# Altium PCB PCB_HB.PcbDoc
Units mil, origin at the board's own origin, x right, y up, seen from the top; angles counter-clockwise.
Board outline 3478 x 2869 mil, 2 copper layers (Top Layer, Bottom Layer); 44 components, 24 nets, 126 pads, 0 vias.
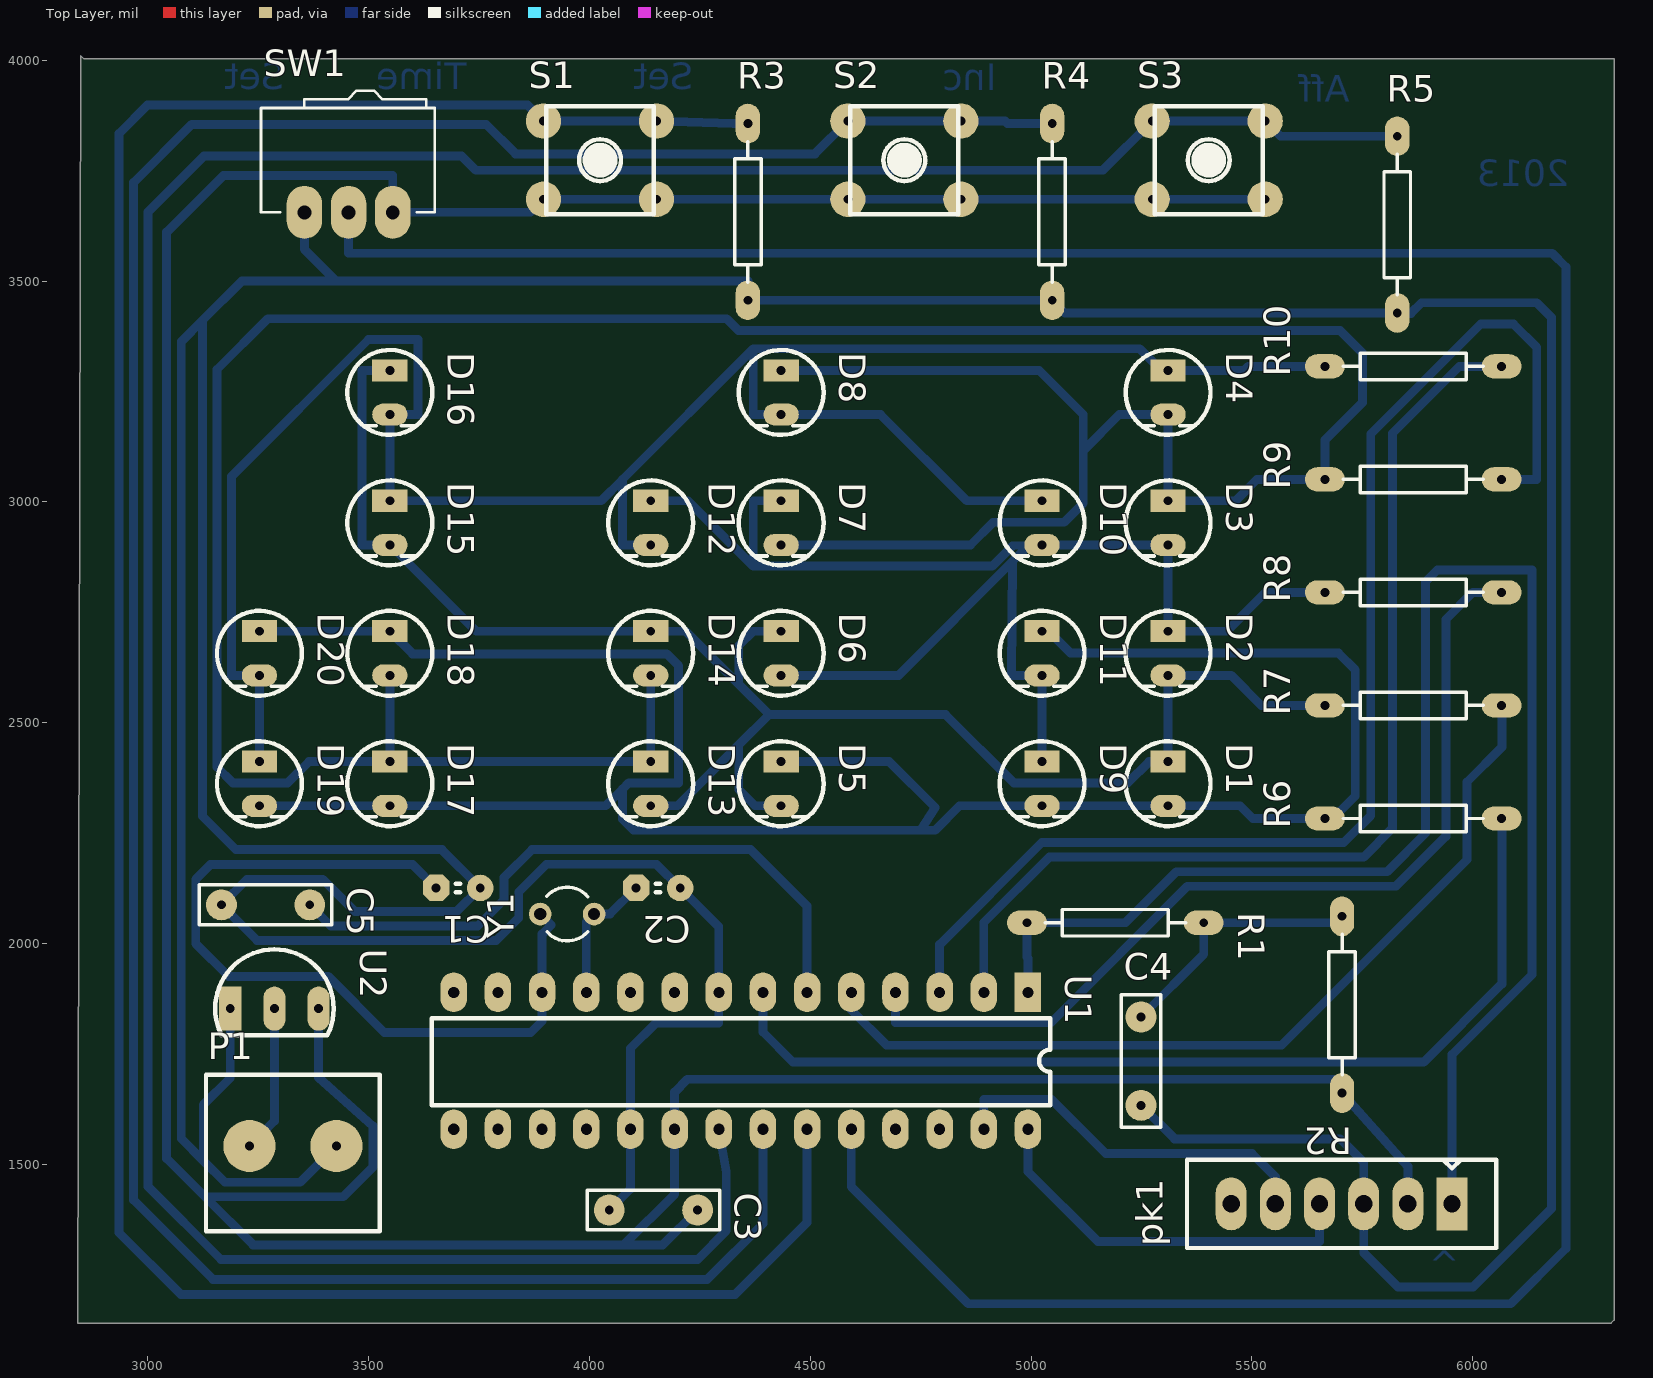
[diagram p0: Top Layer view]
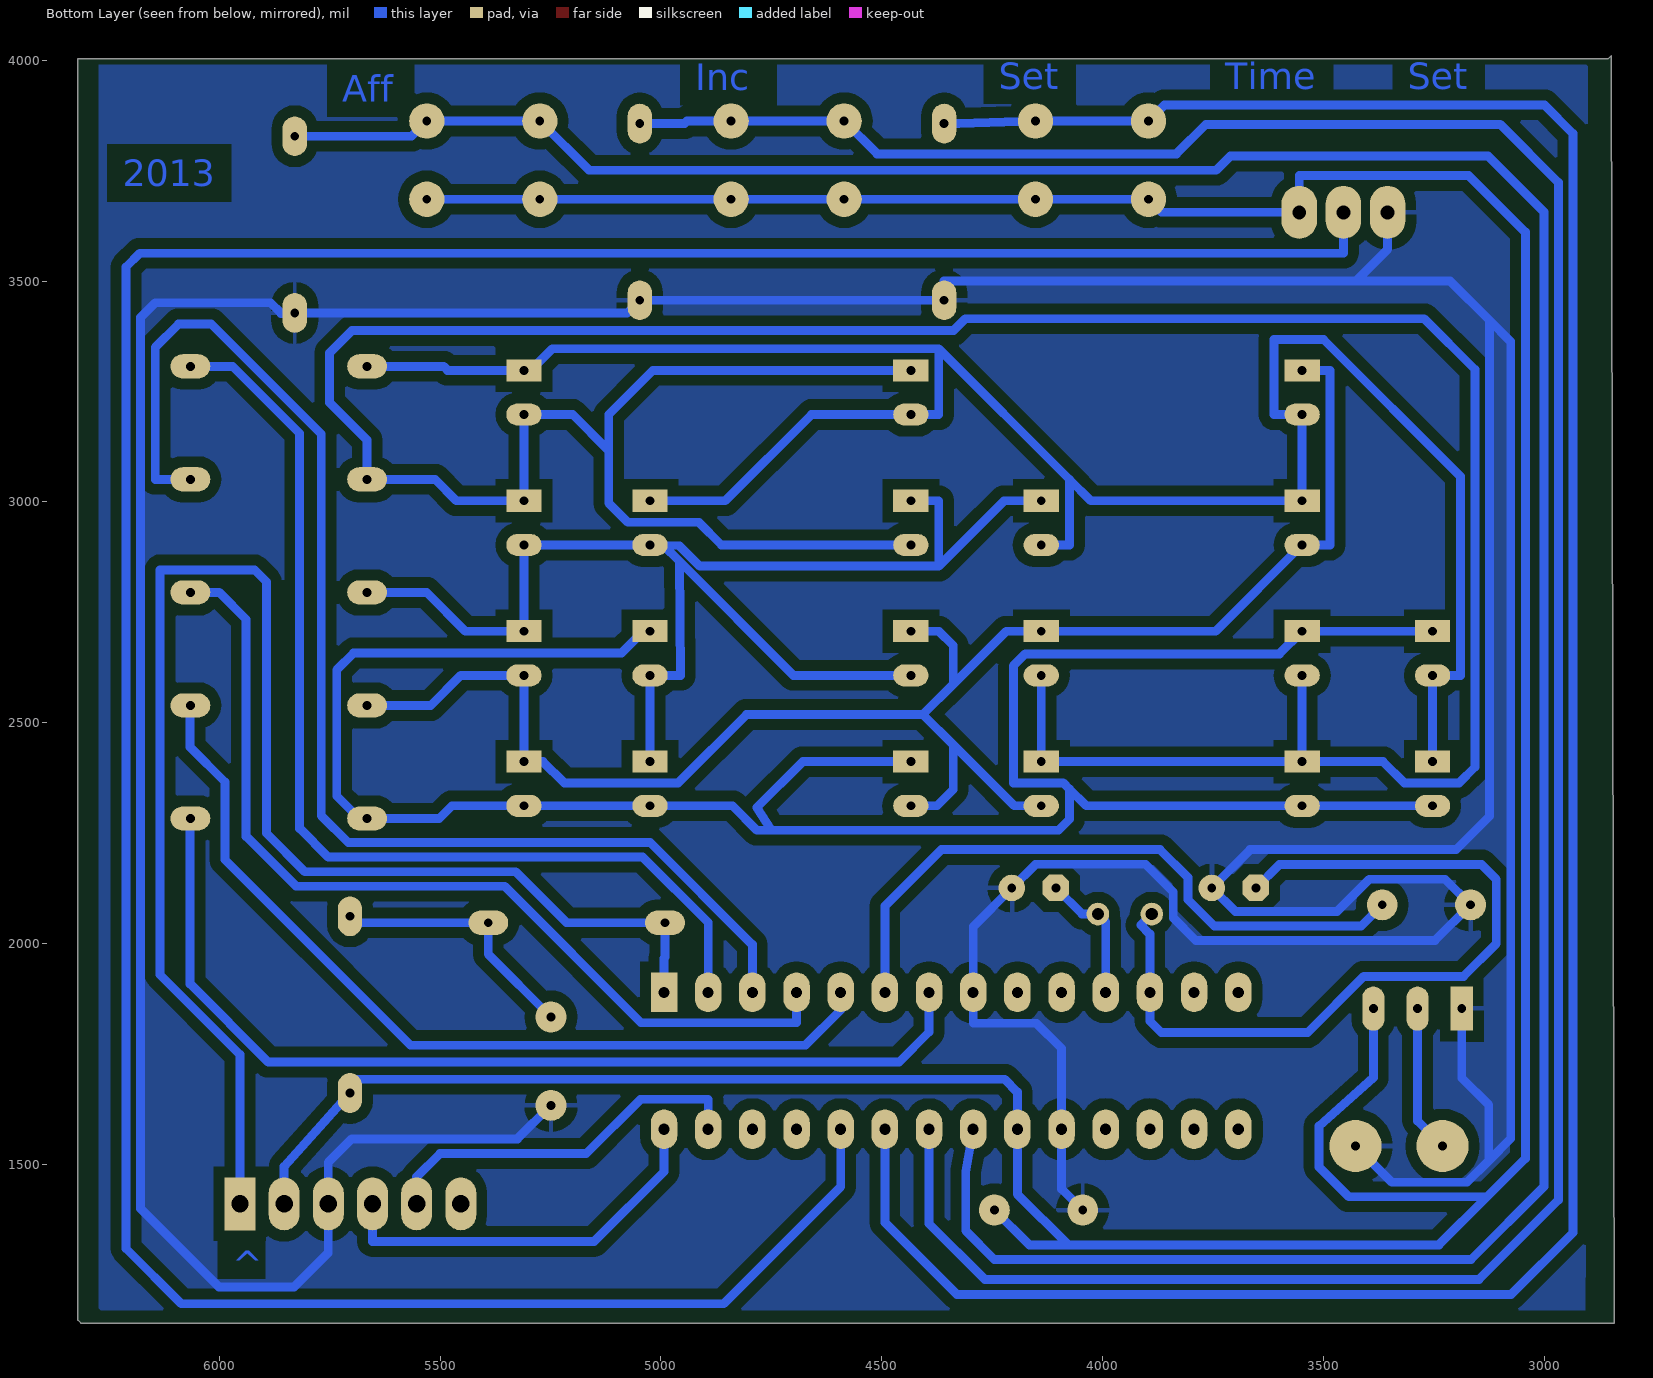
[diagram p1: Bottom Layer view, seen from below]

## Layer stack, top to bottom
Top Layer: signal copper 1.4
Dielectric: dielectric 12.6, FR-4, Dk 4.8
Bottom Layer: signal copper 1.4

## Board outline
2849,4010 2856,4003 6320,4003 6320,1148 6313,1141 2842,1141

## Design rules (kind name [scope] priority, off if disabled: settings)
Clearance [All] p1: gap=13
PolygonConnect [All] p1: connectstyle=Relief reliefconductorwidth=10 reliefentries=4 polygonreliefangle="90 Angle"
RoutingLayers [All] p1: top layer_v5=FALSE bottom layer_v5=TRUE
RoutingVias [All] p1: holewidth=28 width=50 viastyle="Through Hole" minholewidth=28 minwidth=50 maxholewidth=28 maxwidth=50
SilkToSilkClearance [All] p1 off: silktosilkclearance=10
SilkscreenOverComponentPads [All] p1 off: minsilkscreentomaskgap=10
SolderMaskExpansion [All] p1: expansion=4
Width [All] p1: maxlimit=20 minlimit=15 preferedwidth=20
25 further rules are at their usual default settings.

## Classes and differential pairs
net class leds: A B C D E

## Components (designator, comment, footprint, x,y, rotation, side; value= is the part's Value field where it differs from the comment)
C1 "12pF" Capa_ceramique1 3752.84,2126.19 r180 top
C2 "12pF" Capa_ceramique1 4205.6,2126.19 r180 top
C3 "100nF" Capa_plastique 4045,1397 r0 top
C4 "100nF" Capa_plastique 5248.91,1634.06 r90 top
C5 "10uF" Capa_plastique 3167,2088 r0 top
D1 "LED" Led_5mm 5305.12,2362.2 r270 top
D2 "LED" Led_5mm 5305.12,2657.48 r270 top
D3 "LED" Led_5mm 5305.12,2952.76 r270 top
D4 "LED" Led_5mm 5305.12,3248.03 r270 top
D5 "LED" Led_5mm 4429.13,2362.2 r270 top
D6 "LED" Led_5mm 4429.13,2657.48 r270 top
D7 "LED" Led_5mm 4429.13,2952.76 r270 top
D8 "LED" Led_5mm 4429.13,3248.03 r270 top
D9 "LED" Led_5mm 5019.69,2362.2 r270 top
D10 "LED" Led_5mm 5019.69,2952.76 r270 top
D11 "LED" Led_5mm 5019.69,2657.48 r270 top
D12 "LED" Led_5mm 4133.86,2952.76 r270 top
D13 "LED" Led_5mm 4133.86,2362.2 r270 top
D14 "LED" Led_5mm 4133.86,2657.48 r270 top
D15 "LED" Led_5mm 3543.31,2952.76 r270 top
D16 "LED" Led_5mm 3543.31,3248.03 r270 top
D17 "LED" Led_5mm 3543.31,2362.2 r270 top
D18 "LED" Led_5mm 3543.31,2657.48 r270 top
D19 "LED" Led_5mm 3248.03,2362.2 r270 top
D20 "LED" Led_5mm 3248.03,2657.48 r270 top
P1 "Bornier_2" Bornier_2 3132,1542 r0 top
pk1 "pickit3" pickit3 5953,1411 r180 top
R1 "330ohm" "traversant 1/4W" 5130.8,2047.45 r0 top
R2 "10kohm" "traversant 1/4W" 5704,1922 r270 top
R3 "33kohm" "traversant 1/4W" 4358.8,3596.79 r90 top
R4 "33kohm" "traversant 1/4W" 5047.78,3596.79 r90 top
R5 "33kohm" "traversant 1/4W" 5829,3568 r90 top
R6 "470ohm" "traversant 1/4W" 5925.2,2283.46 r180 top
R7 "470ohm" "traversant 1/4W" 5925.2,2539.37 r180 top
R8 "470ohm" "traversant 1/4W" 5925.2,2795.27 r180 top
R9 "470ohm" "traversant 1/4W" 5925.2,3051.18 r180 top
R10 "470ohm" "traversant 1/4W" 5925.2,3307.09 r180 top
S1 "SW-PB" SW_BP 4024.16,3773.95 r0 top
S2 "SW-PB" SW_BP 4713.13,3773.95 r0 top
S3 "SW-PB" SW_BP 5402.11,3773.95 r0 top
SW1 "switch" inverseur 3354.87,3655.84 r0 top
U1 "PIC18F27J53" SPDIP28 4993,1889.97 r270 top
U2 "MCP1702" TO92 3187,1853 r0 top
Y1 "XTAL" R38 3949.69,2067.13 r90 top

## Footprints (in the part's own frame and the unit in brackets; to place one, negate y for a bottom-side part, rotate by r counter-clockwise, add the part's x,y. Pads: shape width x height; smd on the part's side, far side on the other; paste and mask are expansions set on the pad)
Bornier_2 [mm]
  round 3 hole 0.508: 1(2.5,0) 2(7.5,0)
  silkscreen extent 0,-4.9 10,4.1
Capa_ceramique1 [mil]
  round 60 hole 20: 1(0,0)
  oct 60x60 hole 20: 2(100,0)
  silkscreen extent 45,-10 55,10
Capa_plastique [mil]
  round 70 hole 20: 1(0,0) 2(200,0)
  silkscreen extent -50,-45 250,45
inverseur [mil]
  oval 80x120 hole 31.5: 1(0,0) 2(100,0) 3(200,0)
  silkscreen extent -98,0 295,276
Led_5mm [mil]
  rect 50x80 hole 20: 1(-50,5)
  oval 50x80 hole 20: 2(50,5)
  silkscreen extent -96,-91 96,101
pickit3 [mil]
  rect 70x120 hole 39.37: 1(0,0)
  oval 70x120 hole 39.37: 2(100,0) 3(200,0) 4(300,0) 5(400,0) 6(500,0)
  silkscreen extent -100,-100 600,100
R38 [mm] "Crystal, Thru-Hole; 2 Leads; Body 3.1 x 8.2 mm (Dia.xH)"
  round 1.3 hole 0.7: 1(0,1.55) 2(0,-1.55)
  silkscreen extent -1.55,-1.19 1.55,1.17
SPDIP28 [mil]
  rect 90x60 hole 25: 1(0,0)
  oval 90x60 hole 25: 2(0,-100) 3(0,-200) 4(0,-300) 5(0,-400) 6(0,-500) 7(0,-600) 8(0,-700) 9(0,-800) 10(0,-900) 11(0,-1000) 12(0,-1100) 13(0,-1200) 14(0,-1300) 15(310,-1300) 16(310,-1200) 17(310,-1100) 18(310,-1000) 19(310,-900) 20(310,-800) 21(310,-700) 22(310,-600) 23(310,-500) 24(310,-400) 25(310,-300) 26(310,-200) 27(310,-100) 28(310,0)
  silkscreen extent 59,-1350 256,50
SW_BP [mil]
  round 80 hole 20: 1(-127.95,88.59) 2(127.95,88.59) 3(-127.95,-88.58) 4(127.95,-88.58)
  silkscreen extent -122,-122 122,122
TO92 [mil]
  rect 50x100 hole 20: 1(0,0)
  oval 50x100 hole 20: 2(100,0) 3(200,0)
  silkscreen extent -34,-60 234,134
"traversant 1/4W" [mil]
  oval 90x55 hole 20: 1(-140,0) 2(260,0)
  silkscreen extent -99,-30 219,30

## Part data
C1 C2 C3 C4 C5: library part Capa
P1: "Header, 2-Pin"
R1 R2 R3 R4 R5 R6 R7 R8 R9 R10: library part Resistance
S1 S2 S3: "Switch"
Y1: "Crystal Oscillator"

## Nets (pads, with @x,y where several pads share a name; then routed paths per layer and width w, separated by ;. In a path a pad name is that pad's centre, name@x,y a point inside that pad or via, vN(x,y) a via of type N, cw(c..) or ccw(c..) an arc to the next point about the centre after c; other vN are vias at no path point)
A: D4.1 D8.2 D10.1 D12.2 D15.1 D16.2 D19.1 D20.2 R10.2 | length 5067.3
  Bottom Layer w20: D19.1 D20.2 3190,2607.48 3190,3058 3500,3368 3612,3368 3612,3198.03 D16.2 D15.1 4026.75,3002.75 4075,3051 ; D12.2 4075,2902.75 4075,3051 ; D10.1 4854.25,3002.75 4658.97,3198.03 D8.2 4371,3198.03 4371,3347 ; R10.2 5492.06,3307.09 5483,3298.03 D4.1 5295,3298.03 5246.03,3347 4371,3347 ; 4075,3051 4371,3347
A0: R10.1 U1.2 | length 2375.5
  Bottom Layer w20: U1.2 4893,2048 5041,2196 5753,2196 5818,2261 5818,3155.09 5970,3307.09 R10.1
A1: R9.1 U1.3 | length 2948.7
  Bottom Layer w20: U1.3 4793,1998 5024,2229 5708,2229 5769,2290 5769,3154 6018,3403 6092,3403 6145,3350 6145,3051.18 R9.1
A2: R8.1 U1.4 | length 2132.3
  Bottom Layer w20: U1.4 4693,1821 5045,1821 5354,2130 5826,2130 5939,2243 5939,2734 6000.27,2795.27 R8.1
A3: R7.1 U1.5 | length 2024
  Bottom Layer w20: U1.5 4593,1850 4673,1770 5567,1770 5987,2190 5987,2366 6066,2445 6066,2539.37 R7.1
A4: R6.1 U1.7 | length 2239.7
  Bottom Layer w20: U1.7 4393,1800 4461,1732 5889,1732 6066,1909 6066,2283.46 R6.1
AFF: R5.2 S3.1 S3.2 U1.21 | length 6796.7
  Bottom Layer w20: U1.21 4310,1484 4310,1350 4245,1285 3166,1285 3001,1450 3001,3657 3127,3783 3711,3783 3743,3751 5162.62,3751 S3.1 S3.2 5564.6,3828 R5.2
B: D3.1 D4.2 D7.2 D8.1 D13.1 D14.2 D17.1 D18.2 R9.2 | length 7747.5
  Bottom Layer w20: D18.2 D17.1 ; D14.2 D13.1 D17.1 ; D7.2 4862.75,2902.75 4914,2954 5075,2954 5118,2997 5118,3116.03 ; D8.1 5018,3298.03 5118,3198.03 5118,3116.03 ; D17.1 3365.2,2412.2 3317,2364 3193,2364 3157,2400 3157,3300 3272,3415 4311,3415 4338,3388 5700,3388 5750,3338 5750,3225 5665.2,3140.2 R9.2 5511.43,3051.18 5463,3002.75 D3.1 D4.2 5200,3198.03 5118,3116.03
C: D2.1 D3.2 D6.2 D7.1 D9.1 D10.2 D11.2 D12.1 R8.2 | length 3284.4
  Bottom Layer w20: D12.1 4223.13,3002.75 4371.13,2854.75 ; D6.2 4700,2607.48 4957.97,2865.45 ; D7.1 4371.13,3002.75 4371.13,2854.75 ; D9.1 D11.2 4955.9,2607.48 4957.97,2865.45 ; R8.2 5530.79,2795.27 5443,2707.48 D2.1 D3.2 D10.2 ; 4371.13,2854.75 4912,2854.75 4958.25,2901.01 D10.2@4994.48,2901.96 ; 4957.97,2865.45 D10.2@4994.48,2901.96 ; D10.2@4994.48,2901.96 D10.2 ; D10.2@4994.48,2901.96 4995.27,2902.75 D10.2
D: D1.1 D2.2 D5.2 D6.1 D13.2 D14.1 D15.2 D16.1 R7.2 | length 3868.3
  Bottom Layer w20: D16.1 3485,3298.03 3485,2902.75 D15.2 3548.87,2902.75 3744.14,2707.48 D14.1 4218.32,2707.48 4338.13,2587.66 ; D13.2 4200,2312.2 4338.13,2450.34 ; D5.2 4375,2312.2 4338.13,2349.07 4338.13,2450.34 ; D6.1 4370.61,2707.48 4338.13,2675 4338.13,2587.66 ; R7.2 5521.11,2539.37 5453,2607.48 D2.2 D1.1 5267.2,2412.2 5219,2364 4961,2364 4806,2519 4406.8,2519 ; 4338.13,2450.34 4406.8,2519 ; 4338.13,2587.66 4406.8,2519
E: D1.2 D5.1 D9.2 D11.1 D17.2 D18.1 D19.2 D20.1 R6.2 | length 5493.9
  Bottom Layer w20: D19.2 D17.2 4037.2,2312.2 4075,2350 ; D20.1 D18.1 3599.79,2656 4175,2656 4202,2629 4202,2364 4089,2364 4075,2350 ; D5.1 4679,2412.2 4782.8,2308.41 4750,2257 ; D11.1 5040,2707.48 5089.48,2658 5696,2658 5734,2620 5734,2334.46 5683,2283.46 R6.2 5501.74,2283.46 5473,2312.2 D1.2 D9.2 4838,2312.2 4782.8,2257 4750,2257 ; 4075,2350 4075,2282 4100,2257 4750,2257
GND: C1.1 C2.1 C3.1 C4.1 C5.1 P1.2 pk1.3 R3.1 R4.1 R5.1 SW1.1 U1.8 U1.19 U2.1 | length 13967.1
  Bottom Layer w20: U2.1 3187,1696 3126,1635 3126,1508.94 ; SW1.1 3354.87,3572.13 3427,3500 ; P1.2 3345.22,1459.94 3175,1459.94 3126,1508.94 ; C3.1 4093,1445 U1.19 4093,1763 4150,1820 4293,1820 U1.8 4293,2038.79 C2.1 4151.79,2180 3903,2180 3840,2117 3840,2058.35 3788.84,2007.19 3247.81,2007.19 C5.1 3225,2146 3396,2146 3468.81,2073.19 3699.84,2073.19 C1.1 3666.03,2213 3200,2213 3124,2289 3124,3411 ; C4.1 5324.97,1558 5700,1558 5753,1505 pk1.3 5753,1300 5830,1223 6001,1223 6178,1400 6178,3418 6145,3451 5884,3451 5860,3427 5829,3427 R5.1 5076.57,3428 R4.1 R3.1 4358.8,3500 3427,3500 ; 3124,3411 3076,3363 3076,1558.94 3126,1508.94 ; 3124,3411 3213,3500 3427,3500
INC: R4.2 S2.1 S2.2 U1.22 | length 6264.2
  Bottom Layer w20: U1.22 4393,1366 4267,1240 3148,1240 2968,1420 2968,3723 3100,3855 3766,3855 3833,3788 4510.65,3788 S2.1 S2.2 4941,3862.54 4946.75,3856.79 R4.2
MCLR: pk1.1 R1.1 U1.1 | length 3475.7
  Bottom Layer w20: U1.1 4993,1967 4990.8,1969.2 R1.1 5213.45,2047.45 5329,2163 5806,2163 5893,2250 5893,2819 5920,2846 6134,2846 6134,1930 5953,1749 pk1.1
MODE: SW1.2 U1.24 | length 6993.3
  Bottom Layer w20: SW1.2 3454.87,3563 6180,3563 6211,3532 6211,1310 6086,1185 4858,1185 4593,1450 U1.24
NetC1_2: C1.2 U1.12 Y1.1 | length 1864.4
  Bottom Layer w20: C1.2 3600.03,2179 3142,2179 3109,2146 3109,2000 3183,1926 3409,1926 3536,1799 3867,1799 3893,1825 U1.12 3893,2021.65 3913.58,2042.22 Y1.1
NetC2_2: C2.2 U1.11 Y1.2 | length 303.8
  Bottom Layer w20: U1.11 3993,2049.42 Y1.2 4046.54,2067.13 C2.2
NetC4_2: C4.2 R1.2 R2.1 | length 599.9
  Bottom Layer w20: C4.2 5390.8,1975.95 R1.2 5704,2047.45 R2.1
NetC5_2: C5.2 U1.6 | length 1494.7
  Bottom Layer w20: C5.2 3414.81,2040.19 3747.19,2040.19 3807,2100 3807,2150 3870,2213 4365,2213 4493,2085 U1.6
PGC: pk1.5 U1.27 | length 861.9
  Bottom Layer w20: U1.27 4893,1648 5046,1648 5169,1525 5500,1525 5553,1472 pk1.5
PGD: pk1.4 U1.28 | length 906.4
  Bottom Layer w20: U1.28 4993,1484 5151,1326 5653,1326 pk1.4
ROT: R3.2 S1.1 S1.2 U1.23 | length 5848.4
  Bottom Layer w20: R3.2 4326.06,3856.79 S1.2 S1.1 3859.74,3899 3000,3899 2935,3834 2935,1346 3075,1206 4330,1206 4493,1369 U1.23
VBAT: P1.1 U2.2 | length 334.4
  Bottom Layer w20: P1.1 3287,1598.57 U2.2
VCC: C3.2 pk1.2 R2.2 S1.3 S1.4 S2.3 S2.4 S3.3 S3.4 SW1.3 U1.20 U2.3 | length 9126.2
  Bottom Layer w20: U2.3 3387,1697 3510,1587 3510,1494 3442.94,1426.94 3129.8,1426.94 ; C3.2 4166,1318 4078,1318 ; S3.4 S3.3 S2.4 S2.3 4368,3685.37 S1.4 S1.3 3866.68,3655.84 SW1.3 3554.87,3739 3171,3739 3043,3611 3043,1513.74 3129.8,1426.94 ; pk1.2 5853,1496 R2.2 5704,1693 4222,1693 4193,1664 U1.20 4193,1433 4078,1318 ; 3129.8,1426.94 3238.74,1318 4078,1318
pads on no net: pk1.6 U1.9 U1.10 U1.13 U1.14 U1.15 U1.16 U1.17 U1.18 U1.25 U1.26

## Polygon pours and split planes (outlines as drawn)
GND on Bottom Layer "Bottom Layer-No Net" (solid, pour order 15): 2902,3990 6273,3990 6273,1175 6268,1170 2907,1170

## Other copper
Bottom Layer:
  text "Set" at 3309,3935 h60
  text "Time" at 3722,3935 h60
  text "Set" at 4235,3935 h60
  text "Inc" at 4922,3932 h60
  text "Aff" at 5722,3906 h60
  text "2013" at 6218,3715 h60
  text "^" at 5970,1245 h60